# Altium PCB ZMBo 1.1.PcbDoc (part 2 of 4)
Units mil, origin at the board's own origin, x right, y up, seen from the top; angles counter-clockwise.
Board outline 6000 x 4000 mil, 4 copper layers (Top Layer, Groun Plane, Power Plane, Bottom Layer); 280 components, 251 nets, 1047 pads, 1788 vias.
Unrouted connection lines stored in the file: 231.
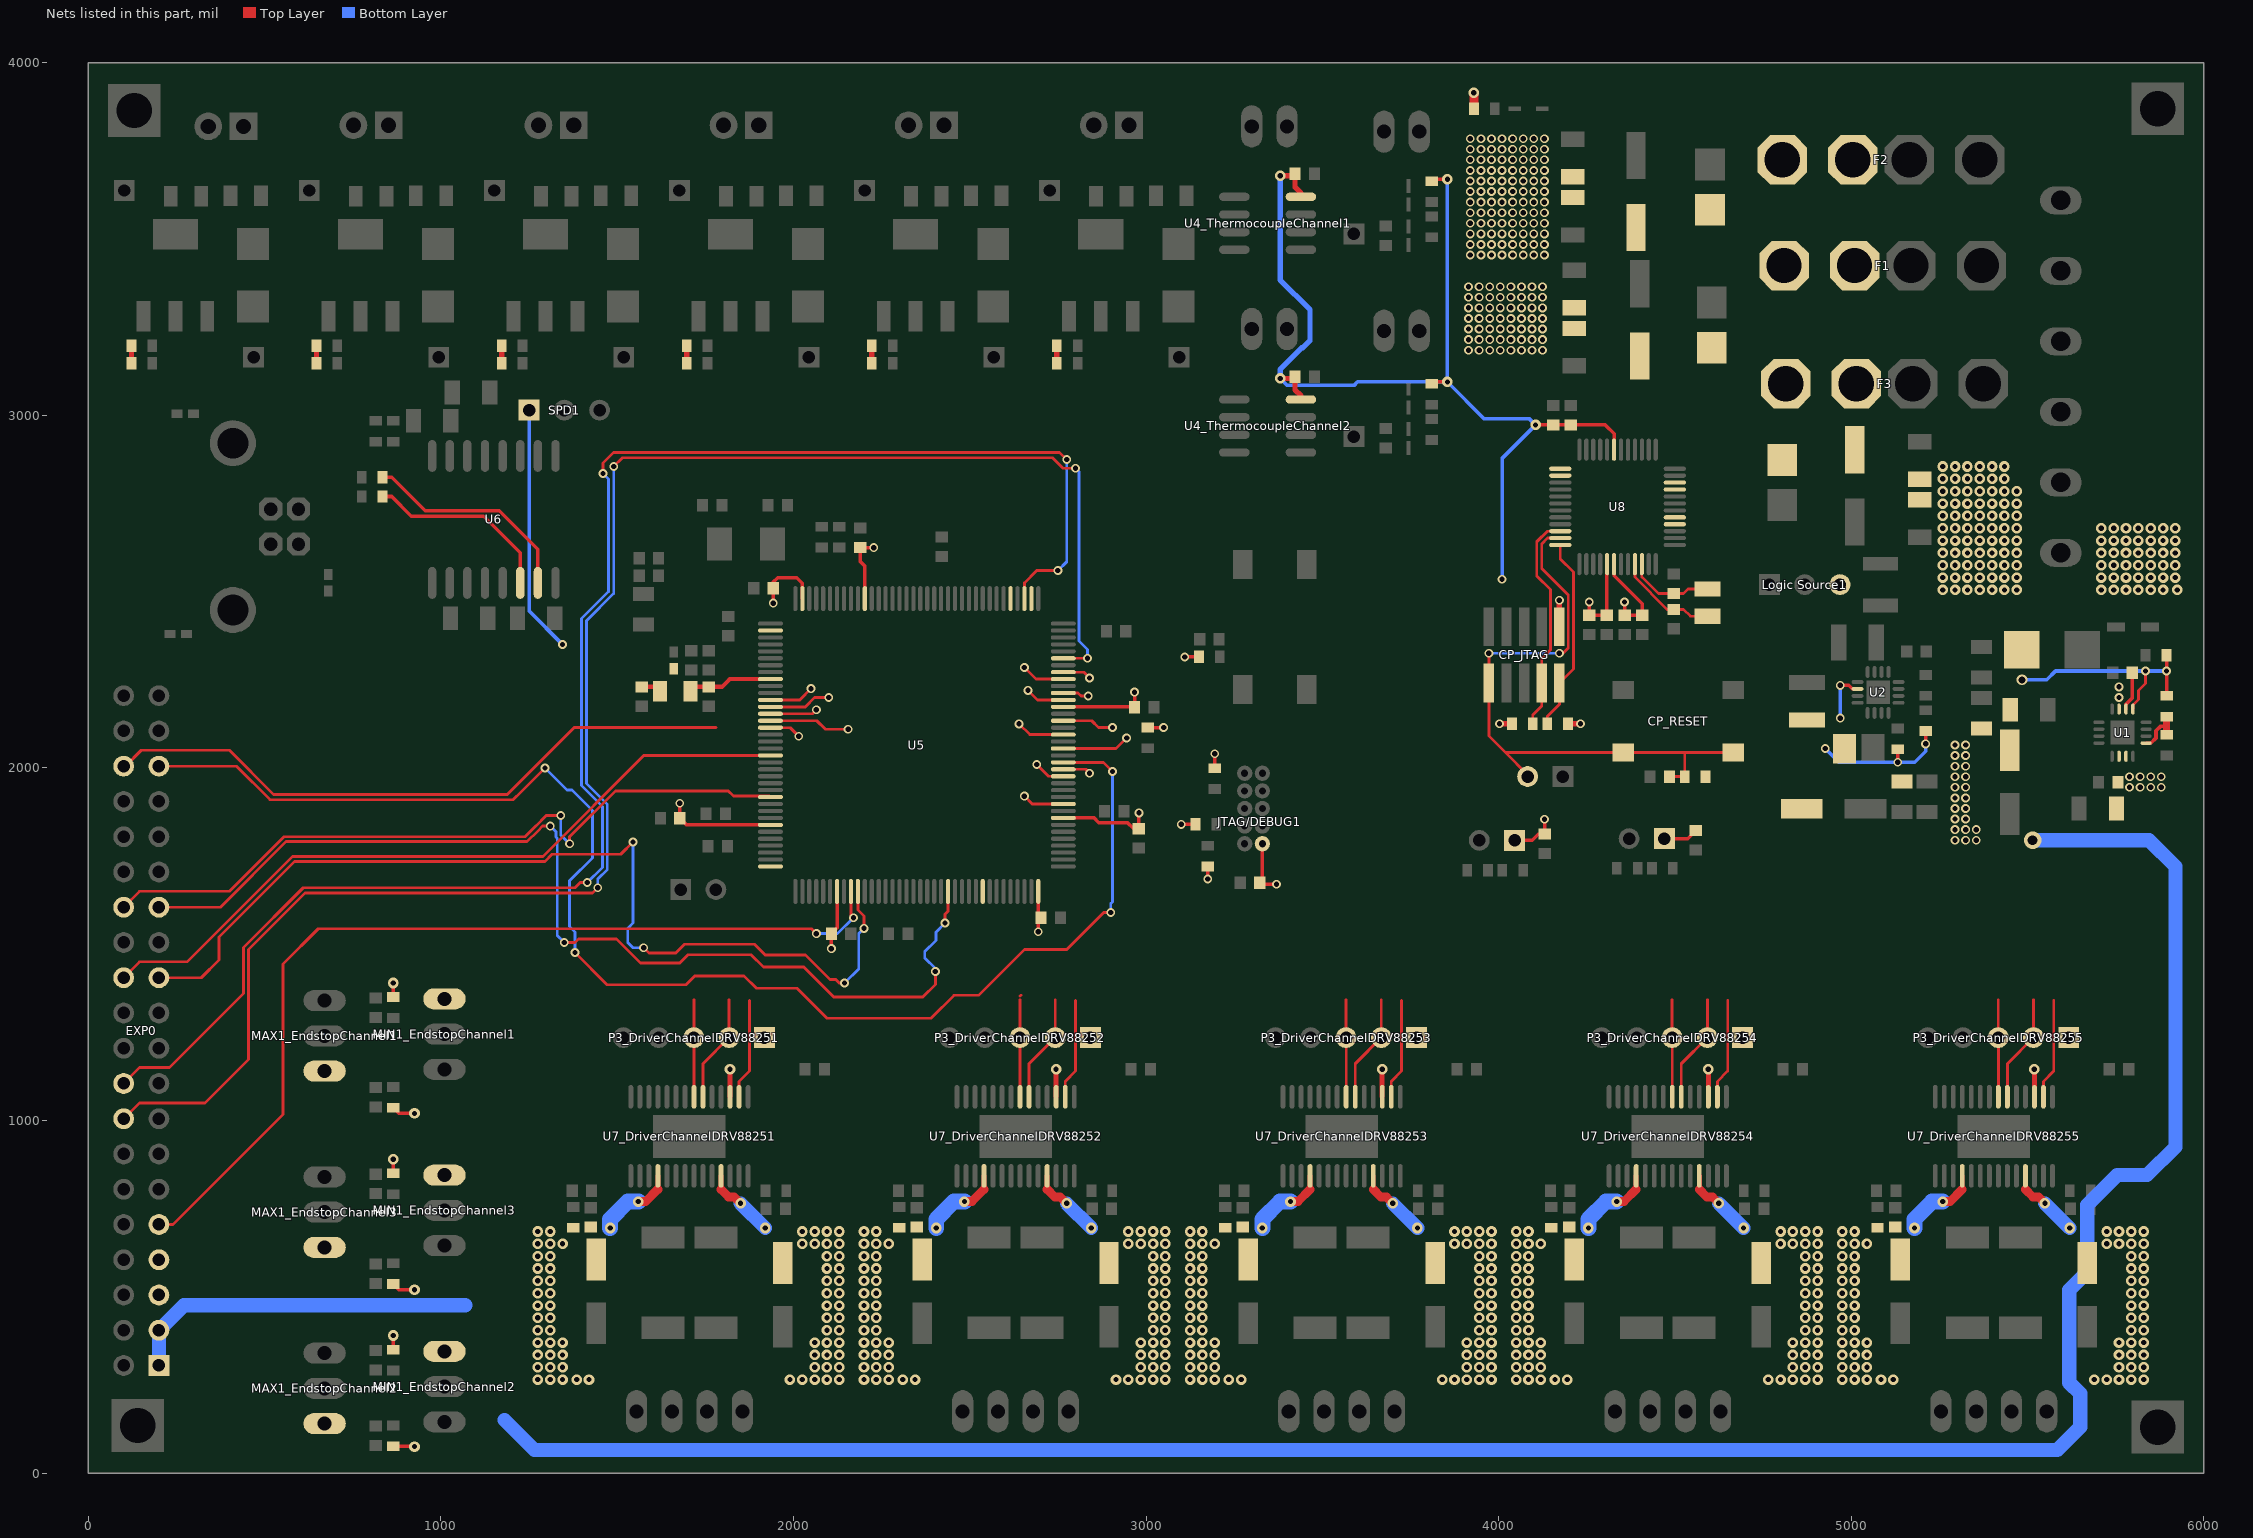
[diagram p4: the nets of this part, all layers, seen from the top]

## Part data
C1_EndstopChannel1 C1_EndstopChannel2 C1_EndstopChannel3 C2_EndstopChannel1 C2_EndstopChannel2 C2_EndstopChannel3 C4 C5 C6 C9 C14 C15 C18 C19 C22 C23 C24 C32 C33 C36 C37 C38 C39 C40 C41 C42 C43 C44 C45 C46 C47 C48 C49 C50 C51 C54 C55 C56 C57 C58 C59 C64 C65 C66_DriverChannelDRV88251 C66_DriverChannelDRV88252 C66_DriverChannelDRV88253 C66_DriverChannelDRV88254 C66_DriverChannelDRV88255 C67_DriverChannelDRV88251 C67_DriverChannelDRV88252 C67_DriverChannelDRV88253 C67_DriverChannelDRV88254 C67_DriverChannelDRV88255 C68_DriverChannelDRV88251 C68_DriverChannelDRV88252 C68_DriverChannelDRV88253 C68_DriverChannelDRV88254 C68_DriverChannelDRV88255 C71_DriverChannelDRV88251 C71_DriverChannelDRV88252 C71_DriverChannelDRV88253 C71_DriverChannelDRV88254 C71_DriverChannelDRV88255 C72 C73 C74 C75 C76 C77 C78 C79 C80: library part "Cap Semi", "Capacitor (Semiconductor SIM Model)"
C3 C12 C16 C69_DriverChannelDRV88251 C69_DriverChannelDRV88252 C69_DriverChannelDRV88253 C69_DriverChannelDRV88254 C69_DriverChannelDRV88255 C70_DriverChannelDRV88251 C70_DriverChannelDRV88252 C70_DriverChannelDRV88253 C70_DriverChannelDRV88254 C70_DriverChannelDRV88255: library part "Cap Pol1", "Polarized Capacitor (Radial)"
C7 C8 C10 C11 C30_ThermistorChannel1 C30_ThermistorChannel2 C31_ThermocoupleChannel1 C31_ThermocoupleChannel2 C60 C61 C62 C63: "Capacitor (Semiconductor SIM Model)"
CP_JTAG: library part "ARM Cortex JTAG-DEBUG Header"
D1: library part "D Zener", "Zener Diode"
D2_FETChannel1 D2_FETChannel2 D2_FETChannel3 D2_FETChannel4 D2_FETChannel5 D2_FETChannel6: "Typical RED GaAs LED"
D3_FETChannel1 D3_FETChannel2 D3_FETChannel3 D3_FETChannel4 D3_FETChannel5 D3_FETChannel6 D4 D6 D8: library part "D Schottky", "Schottky Diode"
D5: "Default Diode"
D7 D9: "Typical RED, GREEN, YELLOW, AMBER GaAs LED"
D11_ThermistorChannel1 D11_ThermistorChannel2 D12_ThermistorChannel1 D12_ThermistorChannel2: "High Conductance Fast Diode"
DBGEN1 kRESET P4 TRST1: "Header, 2-Pin"
EXP0: "Header, 20-Pin, Dual row"
F1 F2 F3 F4: library part "Fuse 1", "Fuse"
FB4 FB9 L2: library part Inductor, "Inductor"
"Logic Source1" SPD1: "Header, 3-Pin"
M1_DriverChannelDRV88251 M1_DriverChannelDRV88252 M1_DriverChannelDRV88253 M1_DriverChannelDRV88254 M1_DriverChannelDRV88255: library part "Molex 0705430003 Alt", "Molex 4 Pin Clip Connector"
MAX1_EndstopChannel1 MAX1_EndstopChannel2 MAX1_EndstopChannel3 MIN1_EndstopChannel1 MIN1_EndstopChannel2 MIN1_EndstopChannel3: library part "Molex Endstop"
P3_DriverChannelDRV88251 P3_DriverChannelDRV88252 P3_DriverChannelDRV88253 P3_DriverChannelDRV88254 P3_DriverChannelDRV88255: "Header, 5-Pin"
Q1_FETChannel1 Q1_FETChannel2 Q1_FETChannel3 Q1_FETChannel4 Q1_FETChannel5 Q1_FETChannel6: library part "Fairchild FDT439N", "N-Channel MOSFET"
R1 R7 R8 R9 R10 R11 R13_ThermistorChannel1 R13_ThermistorChannel2 R14_ThermistorChannel1 R14_ThermistorChannel2 R21 R23: "Resistor"
R2_EndstopChannel1 R2_EndstopChannel2 R2_EndstopChannel3 R3_EndstopChannel1 R3_EndstopChannel2 R3_EndstopChannel3 R4_FETChannel1 R4_FETChannel2 R4_FETChannel3 R4_FETChannel4 R4_FETChannel5 R4_FETChannel6 R5_FETChannel1 R5_FETChannel2 R5_FETChannel3 R5_FETChannel4 R5_FETChannel5 R5_FETChannel6 R6_FETChannel1 R6_FETChannel2 R6_FETChannel3 R6_FETChannel4 R6_FETChannel5 R6_FETChannel6 R12 R15 R16 R17 R18 R19 R20 R22 R24 R25 R26 R27 R28 R29 R30_DriverChannelDRV88251 R30_DriverChannelDRV88252 R30_DriverChannelDRV88253 R30_DriverChannelDRV88254 R30_DriverChannelDRV88255 R31_DriverChannelDRV88251 R31_DriverChannelDRV88252 R31_DriverChannelDRV88253 R31_DriverChannelDRV88254 R31_DriverChannelDRV88255 R32_DriverChannelDRV88251 R32_DriverChannelDRV88252 R32_DriverChannelDRV88253 R32_DriverChannelDRV88254 R32_DriverChannelDRV88255 R33_DriverChannelDRV88251 R33_DriverChannelDRV88252 R33_DriverChannelDRV88253 R33_DriverChannelDRV88254 R33_DriverChannelDRV88255 R34 R35 R36 R37 R38: library part Res3, "Resistor"
THM_TP1_ThermistorChannel1 THM_TP1_ThermistorChannel2: library part Socket, "Socket"
U2: "Buck Step Down Regulator with 3 to 17 V Input and 3.3 V Output, -40 to 85 degC, 16-Pin QFN (RGT), Green (RoHS & no Sb/Br)"
U4_ThermocoupleChannel1 U4_ThermocoupleChannel2: "Cold Junction Compensated Thermocouple to Digital Converter, 14 Bits Temperature Resolution, -40 to 125 degC, 8-Pin SOIC (S8+4), Pb-Free"
U5: library part ATML-ATSAM4EXEA-LQFP-144
U6: "USB Opto Isolator"
U7_DriverChannelDRV88251 U7_DriverChannelDRV88252 U7_DriverChannelDRV88253 U7_DriverChannelDRV88254 U7_DriverChannelDRV88255: "DRV8825 Ti Stepper Driver"
U8: "ARM Cortex M0+"
X1: "ABS07-32.768KHZ-T RTC Crystal Oscillator"
X2: library part XTAL, "Crystal Oscillator"

## Free pads (board coordinates)
  rect 150x150 hole 100: ""(130,3865) ""(140,135) ""(5870,130) ""(5870,3870)

## Via types
v1: diameter 30, hole 15, Top Layer to Bottom Layer, 1271 vias
v2: diameter 25, hole 15, Top Layer to Bottom Layer, 410 vias
v3: diameter 19.68, hole 7.87, Top Layer to Bottom Layer, 75 vias
v4: diameter 50, hole 28, Top Layer to Bottom Layer, 30 vias
v5: diameter 30, hole 20, Top Layer to Bottom Layer, 2 vias

## Nets (pads, with @x,y where several pads share a name; then routed paths per layer and width w, separated by ;. In a path a pad name is that pad's centre, name@x,y a point inside that pad or via, vN(x,y) a via of type N, cw(c..) or ccw(c..) an arc to the next point about the centre after c; other vN are vias at no path point)
2: 
3.3VCC: C4.1 C23.1 C31_ThermocoupleChannel1.2 C31_ThermocoupleChannel2.2 C45.2 C46.2 C47.2 C48.2 C49.2 C50.2 C51.2 C60.2 C61.2 C62.2 C74.2 C75.2 C76.2 C77.2 C78.1 C79.1 CP_JTAG.1 DBGEN1.1 EXP0.5 EXP0.7 FB5.1 JTAG/DEBUG1.1@3330,1785 L2.2 MAX1_EndstopChannel1.3 MAX1_EndstopChannel2.3 MAX1_EndstopChannel3.3 MIN1_EndstopChannel1.3 MIN1_EndstopChannel2.3 MIN1_EndstopChannel3.3 P3_DriverChannelDRV88251.1 P3_DriverChannelDRV88252.1 P3_DriverChannelDRV88253.1 P3_DriverChannelDRV88254.1 P3_DriverChannelDRV88255.1 R2_EndstopChannel1.1 R2_EndstopChannel2.1 R2_EndstopChannel3.1 R3_EndstopChannel1.1 R3_EndstopChannel2.1 R3_EndstopChannel3.1 R11.2 R12.2 R13_ThermistorChannel1.2 R13_ThermistorChannel2.2 R21.2 R24.2 R25.2 R26.2 R27.2 R34.1 R35.1 R36.2 R37.2 SPD1.1 TRST1.1 U2.14 U4_ThermocoupleChannel1.4 U4_ThermocoupleChannel2.4 U5.30 U5.43 U5.72 U5.80 U5.96 U5.134 U5.143 U7_DriverChannelDRV88251.17 U7_DriverChannelDRV88252.17 U7_DriverChannelDRV88253.17 U7_DriverChannelDRV88254.17 U7_DriverChannelDRV88255.17 U8.5 U8.6 U8.31 | length 7774
  Top Layer w10: R2_EndstopChannel2.1@865,75.95 924.05,75.95 v1(925,75) ; R3_EndstopChannel2.1@865,350 v1(865,390) ; R2_EndstopChannel3.1@865,535.95 865,535 880,520 v1(925,520) ; R3_EndstopChannel3.1@865,850 v1(865,890) ; R2_EndstopChannel1.1@865,1035.95 865,1035 880,1020 v1(925,1020) ; R3_EndstopChannel1.1@865,1350 v1(865,1390) ; v2(1677.56,1900) C45.2@1677.56,1857.56 1696.5,1838.62 U5.30@1934.65,1838.62 ; v2(1942.56,2467.56) C51.2@1942.56,2510 1942.56,2527.56 1955,2540 2008.99,2540 2025.2,2523.79 U5.143@2025.2,2480.35 ; v2(2107.44,1487.44) C46.2@2107.44,1530 2123.62,1546.18 U5.43@2123.62,1649.65 ; U5.134@2202.36,2480.35 2202.36,2572.82 2190,2585.19 C50.2@2190,2625 v2(2227.56,2625) ; v2(2694.49,1535.51) U5.72@2694.49,1649.65 ; U5.80@2765.35,1858.31 2852.67,1858.31 2865.98,1845 2947.56,1845 2965,1827.56 C48.2@2982.44,1827.56 ; U5.96@2765.35,2173.27 2966.73,2173.27 C49.2@2967.44,2172.56 v2(2967.44,2215.12) ; C48.2@2980,1830 v2(2980,1872.56) ; R26.2@3005.47,2114.53 v2(3050,2114.53) ; v2(3100,1840) R25.2@3140.47,1840 ; v2(3110,2315) R21.2@3150.47,2315 ; v2(3175,1685) R24.2@3175,1720.47 ; R27.2@3195,1999.53 v2(3195,2040) ; JTAG/DEBUG1.1@3330,1785 3330,1682.44 C62.2@3322.56,1675 3327.56,1670 v2(3370,1670) ; R13_ThermistorChannel2.2@3810,3089.53 3815.47,3095 v1(3855,3095) ; R13_ThermistorChannel1.2@3810,3664.53 3815.47,3670 v1(3855,3670) ; TRST1.1@4045.47,1794.53 4095.47,1794.53 4113.03,1812.09 C61.2@4130.47,1812.09 v2(4130.47,1854.53) ; v1(4105.04,2972.99) C76.2@4155.04,2972.99 C77.2@4205.04,2972.99 4302.6,2972.99 4327.76,2947.84 U8.31@4327.76,2902.87 ; v2(4257.6,2470.55) C75.2@4257.6,2433.11 C74.2@4307.6,2433.11 4307.6,2577.6 U8.5@4308.07,2578.07 ; U8.6@4327.76,2578.07 4327.76,2545.39 4407.6,2465.55 C78.1@4407.6,2433.11 C79.1@4357.6,2433.11 v2(4357.6,2470.55) ; DBGEN1.1@4470.39,1799.45 4536.89,1799.45 C60.2@4560,1822.56 ; v2(4969.58,2234.31) 4993.47,2234.31 5003.62,2224.15 U2.14@5018.51,2224.15 ; v2(5132.58,2016.31) R12.2@5132.58,2052.78 ; v2(5211.58,2068.31) R37.2@5211.58,2104.78
  Top Layer w14: U7_DriverChannelDRV88251.17@1820,1067.36 v1(1820,1145) ; U7_DriverChannelDRV88252.17@2745,1067.36 v1(2745,1145) ; U7_DriverChannelDRV88253.17@3670,1067.36 v1(3670,1145) ; U7_DriverChannelDRV88254.17@4595,1067.36 v1(4595,1145) ; U7_DriverChannelDRV88255.17@5520,1067.36 v1(5520,1145)
  Top Layer w15: v1(3380.51,3105) 3422.95,3105 3422.95,3072.56 3439.49,3056.02 U4_ThermocoupleChannel2.4@3439.49,3045 ; v1(3380.51,3680) 3422.95,3680 3422.95,3647.56 3439.49,3631.02 U4_ThermocoupleChannel1.4@3439.49,3620 ; v2(4002.6,2125.55) R35.1@4038.07,2125.55 ; CP_JTAG.1@4172.6,2400.39 v2(4172.6,2475.47) ; R34.1@4197.13,2125.55 v2(4232.6,2125.55)
  Bottom Layer w10: SPD1.1@1250,3015 1250,2445 v2(1345,2350) ; v1(3380.51,3105) 3400.51,3085 3590,3085 3600,3095 v1(3855,3095) ; v1(3855,3670) v1(3855,3095) ; v2(4010,2535) 4010,2877.95 v1(4105.04,2972.99) 4088.03,2990 3960,2990 v1(3855,3095) ; v2(4926.58,2055.31) 4965.58,2016.31 v2(5132.58,2016.31) 5180.58,2016.31 5211.58,2047.31 v2(5211.58,2068.31) ; v2(4969.58,2141.31) v2(4969.58,2234.31)
  Bottom Layer w15: v1(3380.51,3105) 3380.51,3130.51 3442.13,3192.13 3444.96,3192.13 3465,3212.17 3465,3300 3380.51,3384.49 v1(3380.51,3680)
+5VCC: "Logic Source1.3" C8.2 C9.1 EXP0.1 EXP0.3 L1.2 R7.2 R8.2 R9.1 U1.9 | length 8407
  Top Layer w8: U1.9@5799.53,2166.93 5799.53,2178.31 5815,2193.79 5815,2220 5835,2240 v2(5835,2275)
  Top Layer w10: R7.2@5895,2199.53 v2(5895,2275) R9.1@5895,2324.53
  Bottom Layer w10: v5(5485,2250) 5555,2250 5580,2275 v2(5895,2275)
  Bottom Layer w40: EXP0.1@200,305 EXP0.3@200,405 271,476 1069,476 ; 1180,150 1265,65 5585,65 5650,130 5650,225 5619,256 5619,519 5670,570 5670,760 5755,845 5840,845 5920,925 5920,1720 5845,1795 v4@5520,1795
  other v2: 5295,1795 5325,1795 5355,1795 5295,1825 5325,1825 5355,1825 5295,1855 5325,1855 5295,1885 5325,1885 5295,1915 5325,1915 5295,1945 5325,1945 5295,1975 5325,1975 5295,2005 5325,2005 5295,2035 5325,2035 5295,2065 5325,2065
  other v4: 5515,1795
+12VCC1: C10.2 C11.2 C16.1 C18.2 C19.2 C66_DriverChannelDRV88251.1 C66_DriverChannelDRV88252.1 C66_DriverChannelDRV88253.1 C66_DriverChannelDRV88254.1 C66_DriverChannelDRV88255.1 C69_DriverChannelDRV88251.1 C69_DriverChannelDRV88252.1 C69_DriverChannelDRV88253.1 C69_DriverChannelDRV88254.1 C69_DriverChannelDRV88255.1 C70_DriverChannelDRV88251.1 C70_DriverChannelDRV88252.1 C70_DriverChannelDRV88253.1 C70_DriverChannelDRV88254.1 C70_DriverChannelDRV88255.1 D8.2 F3.2 R30_DriverChannelDRV88251.1 R30_DriverChannelDRV88252.1 R30_DriverChannelDRV88253.1 R30_DriverChannelDRV88254.1 R30_DriverChannelDRV88255.1 U1.2 U1.3 U1.11 U7_DriverChannelDRV88251.4 U7_DriverChannelDRV88251.11 U7_DriverChannelDRV88252.4 U7_DriverChannelDRV88252.11 U7_DriverChannelDRV88253.4 U7_DriverChannelDRV88253.11 U7_DriverChannelDRV88254.4 U7_DriverChannelDRV88254.11 U7_DriverChannelDRV88255.4 U7_DriverChannelDRV88255.11 | length 2214.5
  Top Layer w14: 1615.43,804.43 U7_DriverChannelDRV88251.4@1615.43,842.8 ; 1794.57,804.43 U7_DriverChannelDRV88251.11@1794.57,842.8 ; 2540.43,804.43 U7_DriverChannelDRV88252.4@2540.43,842.8 ; 2719.57,804.43 U7_DriverChannelDRV88252.11@2719.57,842.8 ; 3465.43,804.43 U7_DriverChannelDRV88253.4@3465.43,842.8 ; 3644.57,804.43 U7_DriverChannelDRV88253.11@3644.57,842.8 ; 4390.43,804.43 U7_DriverChannelDRV88254.4@4390.43,842.8 ; 4569.57,804.43 U7_DriverChannelDRV88254.11@4569.57,842.8 ; 5315.43,804.43 U7_DriverChannelDRV88255.4@5315.43,842.8 ; 5494.57,804.43 U7_DriverChannelDRV88255.11@5494.57,842.8
  Top Layer w25: v1(1560,770) 1581,770 1615.43,804.43 ; 1794.57,804.43 1816,783 1832,783 v1(1850,765) ; v1(2485,770) 2506,770 2540.43,804.43 ; 2719.57,804.43 2741,783 2757,783 v1(2775,765) ; v1(3410,770) 3431,770 3465.43,804.43 ; 3644.57,804.43 3666,783 3682,783 v1(3700,765) ; v1(4335,770) 4356,770 4390.43,804.43 ; 4569.57,804.43 4591,783 4607,783 v1(4625,765) ; v1(5260,770) 5281,770 5315.43,804.43 ; 5494.57,804.43 5516,783 5532,783 v1(5550,765)
  Bottom Layer w39: v1(1850,765) v1(1920,695) ; v1(2775,765) v1(2845,695) ; v1(3700,765) v1(3770,695) ; v1(4625,765) v1(4695,695) ; v1(5550,765) v1(5620,695)
  Bottom Layer w45: v1(1480,695) 1480,720 1530,770 v1(1560,770) ; v1(2405,695) 2405,720 2455,770 v1(2485,770) ; v1(3330,695) 3330,720 3380,770 v1(3410,770) ; v1(4255,695) 4255,720 4305,770 v1(4335,770) ; v1(5180,695) 5180,720 5230,770 v1(5260,770)
  other v1: 1275,265 1310,265 1345,265 1385,265 1420,265 1990,265 2025,265 2060,265 2095,265 2130,265 2200,265 2235,265 2270,265 2310,265 2345,265 2915,265 2915,265 2950,265 2950,265 2985,265 2985,265 3020,265 3020,265 3055,265 3055,265 3125,265 3160,265 3195,265 3235,265 3270,265 3840,265 3875,265 3910,265 3945,265 3980,265 4050,265 4085,265 4120,265 4160,265 4195,265 4765,265 4800,265 4835,265 4870,265 4905,265 4975,265 5010,265 5045,265 5085,265 5120,265 5690,265 5725,265 5760,265 5795,265 5830,265 1275,300 1310,300 1345,300 2060,300 2095,300 2130,300 2200,300 2235,300 2235,300 2270,300 2985,300 2985,300 3020,300 3020,300 3055,300 3055,300 3125,300 3160,300 3195,300 3910,300 3945,300 3980,300 4050,300 4085,300 4120,300 4835,300 4870,300 4905,300 4975,300 5010,300 5045,300 5760,300 5795,300 5830,300 1275,335 1310,335 1345,335 2060,335 2095,335 2130,335 2200,335 2235,335 2270,335 2985,335 3020,335 3055,335 3055,335 3125,335 3160,335 3195,335 3910,335 3945,335 3980,335 4050,335 4085,335 4120,335 4835,335 4870,335 4905,335 4975,335 5010,335 5045,335 5760,335 5795,335 5830,335 1275,370 1310,370 1345,370 2060,370 2095,370 2130,370 2200,370 2200,370 2235,370 2235,370 2270,370 2985,370 2985,370 3020,370 3020,370 3055,370 3055,370 3125,370 3160,370 3195,370 3910,370 3945,370 3980,370 4050,370 4085,370 4120,370 4835,370 4870,370 4905,370 4975,370 5010,370 5045,370 5760,370 5795,370 5830,370 1275,405 1310,405 2095,405 2130,405 2200,405 2200,405 2200,405 2200,405 2200,405 2235,405 2235,405 3020,405 3020,405 3055,405 3055,405 3125,405 3125,405 3160,405 3945,405 3980,405 4050,405 4050,405 4085,405 4870,405 4905,405 4975,405 4975,405 5010,405 5795,405 5830,405 1275,440 1310,440 2095,440 2130,440 2200,440 2200,440 2200,440 2200,440 2200,440 2235,440 2235,440 3020,440 3020,440 3055,440 3055,440 3125,440 3125,440 3160,440 3945,440 3980,440 4050,440 4050,440 4085,440 4870,440 4905,440 4975,440 4975,440 5010,440 5795,440 5830,440 1275,475 1310,475 2095,475 2130,475 2200,475 2200,475 2200,475 2200,475 2200,475 2235,475 2235,475 3020,475 3020,475 3055,475 3055,475 3125,475 3125,475 3160,475 3945,475 3980,475 4050,475 4050,475 4085,475 4870,475 4905,475 4975,475 4975,475 5010,475 5795,475 5830,475 1275,510 1310,510 2095,510 2130,510 2200,510 2200,510 2200,510 2200,510 2200,510 2235,510 2235,510 3020,510 3020,510 3055,510 3055,510 3125,510 3125,510 3160,510 3945,510 3980,510 4050,510 4050,510 4085,510 4870,510 4905,510 4975,510 4975,510 5010,510 5795,510 5830,510 1275,545 1310,545 2095,545 2130,545 2200,545 2200,545 2200,545 2200,545 2200,545 2235,545 2235,545 3020,545 3020,545 3055,545 3055,545 3125,545 3125,545 3160,545 3945,545 3980,545 4050,545 4050,545 4085,545 4870,545 4905,545 4975,545 4975,545 5010,545 5795,545 5830,545 1275,580 1310,580 2095,580 2130,580 2200,580 2200,580 2200,580 2200,580 2200,580 2235,580 2235,580 3020,580 3020,580 3055,580 3055,580 3125,580 3125,580 3160,580 3945,580 3980,580 4050,580 4050,580 4085,580 4870,580 4905,580 4975,580 4975,580 5010,580 5795,580 5830,580 1275,615 1310,615 2095,615 2130,615 2200,615 2200,615 2235,615 2235,615 3020,615 3020,615 3055,615 3055,615 3125,615 3160,615 3945,615 3980,615 4050,615 4085,615 4870,615 4905,615 4975,615 5010,615 5795,615 5830,615 1275,650 1310,650 1345,650 2025,650 2060,650 2095,650 2130,650 2200,650 2200,650 2235,650 2235,650 2270,650 2270,650 2950,650 2950,650 2985,650 2985,650 3020,650 3020,650 3055,650 3055,650 3125,650 3160,650 3195,650 3875,650 3910,650 3945,650 3980,650 4050,650 4085,650 4120,650 4800,650 4835,650 4870,650 4905,650 4975,650 5010,650 5045,650 5725,650 5760,650 5795,650 5830,650 1275,685 1310,685 2025,685 2060,685 2095,685 2130,685 2200,685 2200,685 2235,685 2235,685 2950,685 2950,685 2985,685 2985,685 3020,685 3020,685 3055,685 3055,685 3125,685 3160,685 3875,685 3910,685 3945,685 3980,685 4050,685 4085,685 4800,685 4835,685 4870,685 4905,685 4975,685 5010,685 5725,685 5760,685 5795,685 5830,685 5260,2505 5295,2505 5330,2505 5365,2505 5400,2505 5435,2505 5470,2505 5710,2505 5745,2505 5780,2505 5815,2505 5850,2505 5885,2505 5925,2505 5260,2540 5295,2540 5330,2540 5365,2540 5400,2540 5435,2540 5470,2540 5710,2540 5745,2540 5780,2540 5815,2540 5850,2540 5885,2540 5920,2540 5260,2575 5295,2575 5330,2575 5365,2575 5400,2575 5435,2575 5470,2575 5710,2575 5745,2575 5780,2575 5815,2575 5850,2575 5885,2575 5920,2575 5260,2610 5295,2610 5330,2610 5365,2610 5400,2610 5435,2610 5470,2610 5710,2610 5745,2610 5780,2610 5815,2610 5850,2610 5885,2610 5920,2610 5260,2645 5295,2645 5330,2645 5365,2645 5400,2645 5435,2645 5470,2645 5710,2645 5745,2645 5780,2645 5815,2645 5850,2645 5885,2645 5920,2645 5260,2680 5295,2680 5330,2680 5365,2680 5400,2680 5435,2680 5470,2680 5710,2680 5745,2680 5780,2680 5815,2680 5850,2680 5885,2680 5920,2680 5260,2715 5295,2715 5330,2715 5365,2715 5400,2715 5435,2715 5470,2715 5260,2750 5295,2750 5330,2750 5365,2750 5400,2750 5435,2750 5470,2750 5260,2785 5295,2785 5330,2785 5365,2785 5400,2785 5435,2785 5470,2785 5260,2820 5295,2820 5330,2820 5365,2820 5400,2820 5435,2820 5260,2855 5295,2855 5330,2855 5365,2855 5400,2855 5435,2855
  other v2: 5790,1945 5820,1945 5850,1945 5880,1945 5790,1975 5820,1975 5850,1975 5880,1975 5760.16,2200 5760,2230
+12VCC2: C3.1 C5.2 C6.2 D4.2 F2.2 R1.2 | length 45.2
  Top Layer w8: R1.2@3930,3870.47 R1.2@3930.47,3870
  Top Layer w25: R1.2@3930,3870.47 v1(3930,3915)
  other v2: 3920,3455 3950,3455 3980,3455 4010,3455 4040,3455 4070,3455 4100,3455 4130,3455 3920,3485 3950,3485 3980,3485 4010,3485 4040,3485 4070,3485 4100,3485 4130,3485 3920,3515 3950,3515 3980,3515 4010,3515 4040,3515 4070,3515 4100,3515 4130,3515 3920,3545 3950,3545 3980,3545 4010,3545 4040,3545 4070,3545 4100,3545 4130,3545 3920,3575 3950,3575 3980,3575 4010,3575 4040,3575 4070,3575 4100,3575 4130,3575 3920,3605 3950,3605 3980,3605 4010,3605 4040,3605 4070,3605 4100,3605 4130,3605 3920,3635 3950,3635 3980,3635 4010,3635 4040,3635 4070,3635 4100,3635 4130,3635 3920,3665 3950,3665 3980,3665 4010,3665 4040,3665 4070,3665 4100,3665 4130,3665 3920,3695 3950,3695 3980,3695 4010,3695 4040,3695 4070,3695 4100,3695 4130,3695 3920,3725 3950,3725 3980,3725 4010,3725 4040,3725 4070,3725 4100,3725 4130,3725 3920,3755 3950,3755 3980,3755 4010,3755 4040,3755 4070,3755 4100,3755 4130,3755 3920,3785 3950,3785 3980,3785 4010,3785 4040,3785 4070,3785 4100,3785 4130,3785
+12VCC3: C12.1 C14.2 C15.2 D6.2 F1.2
  other v2: 3915,3185 3945,3185 3975,3185 4005,3185 4035,3185 4065,3185 4095,3185 4125,3185 3915,3215 3945,3215 3975,3215 4005,3215 4035,3215 4065,3215 4095,3215 4125,3215 3915,3245 3945,3245 3975,3245 4005,3245 4035,3245 4065,3245 4095,3245 4125,3245 3915,3275 3945,3275 3975,3275 4005,3275 4035,3275 4065,3275 4095,3275 4125,3275 3915,3305 3945,3305 3975,3305 4005,3305 4035,3305 4065,3305 4095,3305 4125,3305 3915,3335 3945,3335 3975,3335 4005,3335 4035,3335 4065,3335 4095,3335 4125,3335 3915,3365 3945,3365 3975,3365 4005,3365 4035,3365 4065,3365 4095,3365 4125,3365
ADC_TRIGGER: U5.36
ATSAM_SS: U5.64
AVDD3.3: C64.2 FB9.1 | length 56.9
  Top Layer w12: C64.2@1570,2230.12 1609.13,2230.12 FB9.1@1621.69,2217.56
AVREF: C65.2 FB9.2 U5.9 | length 240.6
  Top Layer w12: FB9.2@1708.31,2217.56 1720.87,2230.12 C65.2@1760,2230.12 1797.56,2230.12 1819.45,2252.01 U5.9@1934.65,2252.01
BST: C7.2 U1.10 | length 110.4
  Top Layer w10: U1.10@5779.84,2166.93 5779.84,2180.59 5797.56,2198.3 C7.2@5797.56,2270
CP_EXTAL0: C72.1 U8.9 X1.2 | length 288.4
  Top Layer w8: U8.9@4386.81,2578.07 4386.81,2541.34 4478.27,2449.88 C72.1@4497.6,2449.88 4525.04,2449.88 4544.37,2430.55 X1.2@4592.6,2430.55
CP_RESET: C80.1 CP_JTAG.10 CP_RESET.2 P4.2 R36.1 U8.47 | length 1762.8
  Top Layer w8: v2(3972.6,2325.47) CP_JTAG.10@3972.6,2240.55 3972.6,2090.55 4019.76,2043.39 ; P4.2@4082.6,1975.55 4082.6,1980.55 4019.76,2043.39 ; v2(4172.6,2325.47) 4182.6,2325.47 4197.6,2340.47 4197.6,2490.47 4122.6,2565.47 4122.6,2635.47 4139.02,2651.89 U8.47@4175.2,2651.89 ; C80.1@4485.16,1975.55 R36.1@4528.07,1975.55 4528.07,2037.91 ; CP_RESET.2@4665.16,2043.39 CP_RESET.2@4354.13,2043.39 4019.76,2043.39
  Bottom Layer w8: v2(3972.6,2325.47) v2(4172.6,2325.47)
CP_TCK/SWDCLK: CP_JTAG.4 R35.2 U8.46 | length 631.9
  Top Layer w8: R35.2@4097.13,2125.55 4097.13,2150.08 4122.6,2175.55 CP_JTAG.4@4122.6,2240.55 4122.6,2310.51 4147.36,2335.27 4147.36,2505.71 4108.6,2544.47 4108.6,2641.47 4138.7,2671.57 U8.46@4175.2,2671.57
CP_TMS/SWDIO: CP_JTAG.2 R34.2 U8.48 | length 553
  Top Layer w8: R34.2@4138.07,2125.55 4138.07,2146.02 4172.6,2180.55 CP_JTAG.2@4172.6,2240.55 4212.6,2280.55 4212.6,2555.47 4175.2,2592.87 U8.48@4175.2,2632.2
CP_XTAL0: C73.1 U8.10 X1.1 | length 247.1
  Top Layer w8: U8.10@4406.5,2578.07 4406.5,2541.65 4453.39,2494.77 C73.1@4497.6,2494.77 4525.04,2494.77 4537.6,2507.32 X1.1@4592.6,2507.32
DIR: P3_DriverChannelDRV88251.2 P3_DriverChannelDRV88252.2 P3_DriverChannelDRV88253.2 P3_DriverChannelDRV88254.2 P3_DriverChannelDRV88255.2 U7_DriverChannelDRV88251.20 U7_DriverChannelDRV88252.20 U7_DriverChannelDRV88253.20 U7_DriverChannelDRV88254.20 U7_DriverChannelDRV88255.20 | length 1530
  Top Layer w8: U7_DriverChannelDRV88251.20@1743.39,1067.2 1743.39,1160.89 P3_DriverChannelDRV88251.2@1817.5,1235 1817.5,1342.5 ; U7_DriverChannelDRV88252.20@2668.39,1067.2 2668.39,1160.89 P3_DriverChannelDRV88252.2@2742.5,1235 2742.5,1342.5 ; U7_DriverChannelDRV88253.20@3593.39,1067.2 3593.39,1160.89 P3_DriverChannelDRV88253.2@3667.5,1235 3667.5,1342.5 ; U7_DriverChannelDRV88254.20@4518.39,1067.2 4518.39,1160.89 P3_DriverChannelDRV88254.2@4592.5,1235 4592.5,1342.5 ; U7_DriverChannelDRV88255.20@5443.39,1067.2 5443.39,1160.89 P3_DriverChannelDRV88255.2@5517.5,1235 5517.5,1342.5
DIR1: U5.113
DIR2: U5.110
DIR3: U5.101 | length 81.6
  Top Layer w8: U5.101@2765.35,2271.69 2823.31,2271.69 v2(2840,2255)
DIR4: U5.98 | length 74.5
  Top Layer w8: U5.98@2765.35,2212.64 2807.36,2212.64 2816.18,2203.82 v2(2836.18,2203.82)
DIR5: U5.92 | length 138
  Top Layer w8: v2(2640,2125) 2670.47,2094.53 U5.92@2765.35,2094.53
DIR_EXP1: EXP0.27 U5.59 | length 3014.4
  Top Layer w8: EXP0.27@200,1605 374.4,1605 560.4,1791 1244.38,1791 1274.88,1821.5 1275.09,1821.5 1288.59,1835 v2(1310,1835) ; v2(1350,1505) 1380,1505 1390,1515 1498.38,1515 1566.38,1447 1677.6,1447 1700.6,1470 1879.8,1470 1914.8,1435 2029.07,1435 2069.13,1394.94 2069.46,1394.94 2114.4,1350 2366.82,1350 2402.5,1385.68 v2(2402.5,1422.5) ; v2(2430,1560) 2430,1585 2438.58,1593.58 U5.59@2438.58,1649.65
  Bottom Layer w8: v2(1310,1835) 1326,1819 1326,1804.2 1330,1800.2 1330,1525 v2(1350,1505) ; v2(2402.5,1422.5) 2402.5,1430.68 2372.5,1460.68 2372.5,1479.32 2403.94,1510.76 2403.94,1533.94 v2(2430,1560)
DIR_EXP2: EXP0.28 U5.26 | length 2088.9
  Top Layer w8: EXP0.28@100,1605 145,1650 399.6,1650 554.6,1805 1238.58,1805 1269.08,1835.5 1269.29,1835.5 1298.79,1865 v2(1340,1865) ; v2(1365,1785) 1365,1805 1495,1935 1815,1935 1830,1920 1932.01,1920 U5.26@1934.65,1917.36
  Bottom Layer w8: v2(1340,1865) 1340,1810 v2(1365,1785)
DM_N: R18.1 U6.6 | length 541.9
  Top Layer w10: R18.1@834.53,2770 860,2770 916,2714 1121,2714 1225,2610 U6.6@1225,2524.88
DP_P: R20.1 U6.7 | length 620.5
  Top Layer w10: R20.1@834.53,2825 860,2825 955,2730 1165,2730 1275,2620 U6.7@1275,2524.88
DRV_RESET: U7_DriverChannelDRV88251.16 U7_DriverChannelDRV88252.16 U7_DriverChannelDRV88253.16 U7_DriverChannelDRV88254.16 U7_DriverChannelDRV88255.16 | length 1424.6
  Top Layer w8: U7_DriverChannelDRV88251.16@1845.75,1067.2 1845.75,1110.75 1875,1140 1875,1340 ; U7_DriverChannelDRV88252.16@2770.75,1067.2 2770.75,1110.75 2800,1140 2800,1340 ; U7_DriverChannelDRV88253.16@3695.75,1067.2 3695.75,1110.75 3725,1140 3725,1340 ; U7_DriverChannelDRV88254.16@4620.75,1067.2 4620.75,1110.75 4650,1140 4650,1340 ; U7_DriverChannelDRV88255.16@5545.75,1067.2 5545.75,1110.75 5575,1140 5575,1340
DRV_RESET1: U5.82 | length 119.6
  Top Layer w8: v2(2655,1920) 2677.32,1897.68 U5.82@2765.35,1897.68
DRV_RESET2: U5.86 | length 89.3
  Top Layer w8: v2(2690,2010) 2723.58,1976.42 U5.86@2765.35,1976.42
DRV_RESET3: U5.90 | length 192
  Top Layer w8: U5.90@2765.35,2055.16 2915.16,2055.16 v2(2945,2085)
DRV_RESET4: U5.94 | length 147.5
  Top Layer w8: U5.94@2765.35,2133.9 2846.1,2133.9 2865,2115 v2(2905,2115)
DRV_RESET5: U5.97 | length 111.6
  Top Layer w8: v2(2665,2220) 2692.05,2192.95 U5.97@2765.35,2192.95
DRV_RESET_EXP1: EXP0.35 U5.88 | length 4087
  Top Layer w8: EXP0.35@200,2005 420,2005 515,1910 1204.99,1910 1228.49,1933.5 v2(1295,2000) ; v2(1380,1476.25) 1471.25,1385 1695,1385 1720,1410 1860,1410 1895,1375 2009.87,1375 2094.87,1290 2390,1290 2455,1355 2525,1355 2655,1485 2775,1485 2880,1590 v2(2900,1590) ; U5.88@2765.35,2015.79 2879.21,2015.79 v2(2905,1990)
  Bottom Layer w8: v2(1295,2000) 1357.5,1937.5 1371.28,1937.5 1430,1878.78 1430,1745 1365,1680 1365,1550 1380,1535 v2(1380,1476.25) ; v2(2900,1590) 2900,1615 2905,1620 v2(2905,1990)
DRV_RESET_EXP2: EXP0.36 U5.2 | length 1829.1
  Top Layer w8: EXP0.36@100,2005 105,2005 150,2050 400,2050 525,1925 1188.18,1925 1378.18,2115 1780,2115
EN: P3_DriverChannelDRV88251.3 P3_DriverChannelDRV88252.3 P3_DriverChannelDRV88253.3 P3_DriverChannelDRV88254.3 P3_DriverChannelDRV88255.3 U7_DriverChannelDRV88251.21 U7_DriverChannelDRV88252.21 U7_DriverChannelDRV88253.21 U7_DriverChannelDRV88254.21 U7_DriverChannelDRV88255.21 | length 1379.6
  Top Layer w8: P3_DriverChannelDRV88251.3@1717.5,1235 1717.5,1342.5 ; U7_DriverChannelDRV88251.21@1717.8,1067.2 P3_DriverChannelDRV88251.3@1717.8,1235 ; P3_DriverChannelDRV88252.3@2642.5,1235 2642.5,1342.5 ; U7_DriverChannelDRV88252.21@2642.8,1067.2 P3_DriverChannelDRV88252.3@2642.8,1235 ; 2642.8,1352.8 2645,1355 ; P3_DriverChannelDRV88253.3@3567.5,1235 3567.5,1342.5 ; U7_DriverChannelDRV88253.21@3567.8,1067.2 P3_DriverChannelDRV88253.3@3567.8,1235 ; P3_DriverChannelDRV88254.3@4492.5,1235 4492.5,1342.5 ; U7_DriverChannelDRV88254.21@4492.8,1067.2 P3_DriverChannelDRV88254.3@4492.8,1235 ; P3_DriverChannelDRV88255.3@5417.5,1235 5417.5,1342.5 ; U7_DriverChannelDRV88255.21@5417.8,1067.2 P3_DriverChannelDRV88255.3@5417.8,1235
EN1: U5.12 | length 128.6
  Top Layer w8: U5.12@1934.65,2192.95 2017.95,2192.95 v2(2050,2225)
EN2: U5.13 | length 176.4
  Top Layer w8: U5.13@1934.65,2173.27 2033.27,2173.27 2060,2200 v2(2100,2200)
EN3: U5.14 | length 135.1
  Top Layer w8: U5.14@1934.65,2153.58 2053.58,2153.58 v2(2065,2165)
EN4: U5.15 | length 230.3
  Top Layer w8: U5.15@1934.65,2133.9 2066.1,2133.9 2090,2110 v2(2155,2110)
EN5: U5.16 | length 90.4
  Top Layer w8: U5.16@1934.65,2114.21 1990.79,2114.21 v2(2015,2090)
EN_EXP1: EXP0.23 U5.46 | length 2806.8
  Top Layer w8: EXP0.23@200,1405 320,1405 370,1455 370,1520 585,1735 1295,1735 1315,1755 1510,1755 v2(1545,1790) ; v2(1575,1490) 1590,1475 1666.01,1475 1691.01,1500 1889.4,1500 1919.9,1469.5 2034.17,1469.5 2080.72,1422.94 2081.05,1422.94 2103.99,1400 2120,1400 2130,1390 v2(2145,1390) ; U5.46@2182.68,1649.65 2182.68,1597.32 2200,1580 v2(2200,1545)
  Bottom Layer w8: v2(1545,1790) 1545,1560 1530,1545 1530,1505 1545,1490 v2(1575,1490) ; v2(2145,1390) 2185.06,1430.06 2185.06,1496.88 2185,1496.94 2185,1530 v2(2200,1545)
EN_EXP2: EXP0.24 U5.20 | length 2095.8
  Top Layer w8: EXP0.24@100,1405 145,1450 280,1450 579,1749 1289,1749 1575.47,2035.47 U5.20@1934.65,2035.47
ERASE: U5.87 | length 79.2
  Top Layer w8: U5.87@2765.35,1996.1 2828.9,1996.1 v2(2840,1985)
EXP_CS: EXP0.9 U5.45 | length 2669.6
  Top Layer w8: EXP0.9@200,705 240,705 552,1017 552,1444.01 651.99,1544 2051,1544 v2(2065,1530) ; U5.45@2162.99,1649.65 2162.99,1582.01 v2(2170,1575)
  Bottom Layer w8: v2(2065,1530) 2125,1530 v2(2170,1575)
EXP_INTERRUP1: EXP0.16 U5.103 | length 5015.9
  Top Layer w8: EXP0.16@100,1005 145,1050 330.6,1050 454,1173.4 454,1484.6 614.4,1645 1430,1645 v2(1445,1660) ; v2(1490,2855) 1515,2880 2735,2880 2765,2850 v2(2800,2850) ; U5.103@2765.35,2311.06 v2(2833.94,2311.06)
  Bottom Layer w8: v2(1445,1660) 1445,1685.2 1472,1712.2 1472,1896.18 1412.5,1955.68 1412.5,2417.7 1490,2495.2 v2(1490,2855) ; v2(2800,2850) 2810,2840 2810,2360 2833.94,2336.06 v2(2833.94,2311.06)
EXP_INTERRUP2: EXP0.18 U5.111 | length 4713
  Top Layer w8: EXP0.18@100,1105 145,1150 230,1150 440,1360 440,1490.4 609.6,1660 1380,1660 1395,1675 v2(1415,1675) ; v2(1460,2835) 1460,2865 1490,2895 2755,2895 v2(2775,2875) ; U5.111@2655.12,2480.35 2655.12,2525.12 2690,2560 v2(2750,2560)
  Bottom Layer w8: v2(1415,1675) 1458,1718 1458,1890.38 1398.5,1949.88 1398.5,2423.5 1475,2500 1475,2820 v2(1460,2835) ; v2(2750,2560) 2775,2585 v2(2775,2875)
EXP_SYNC: U5.100 | length 124
  Top Layer w8: v2(2655,2285) 2687.99,2252.01 U5.100@2765.35,2252.01
FB: R7.1 R10.2 U1.5 | length 134.9
  Top Layer w10: U1.5@5836.93,2070.47 5850.59,2070.47 5865,2084.89 5865,2105 5877.74,2117.74 5895,2117.74
  Top Layer w20: R10.2@5895,2095 R7.1@5895,2140.47
FET_PWM: R5_FETChannel1.1 R5_FETChannel2.1 R5_FETChannel3.1 R5_FETChannel4.1 R5_FETChannel5.1 R5_FETChannel6.1 R6_FETChannel1.1 R6_FETChannel2.1 R6_FETChannel3.1 R6_FETChannel4.1 R6_FETChannel5.1 R6_FETChannel6.1 | length 300
  Top Layer w15: R6_FETChannel1.1@122.17,3148 R5_FETChannel1.1@122.17,3198 ; R6_FETChannel2.1@647.17,3148 R5_FETChannel2.1@647.17,3198 ; R6_FETChannel3.1@1172.17,3148 R5_FETChannel3.1@1172.17,3198 ; R6_FETChannel4.1@1697.17,3148 R5_FETChannel4.1@1697.17,3198 ; R6_FETChannel5.1@2222.17,3148 R5_FETChannel5.1@2222.17,3198 ; R6_FETChannel6.1@2747.17,3148 R5_FETChannel6.1@2747.17,3198
FET_PWM1: U8.16
FET_PWM2: U8.17
FET_PWM3: U8.21
FET_PWM4: U8.22
FET_PWM5: U8.38
FET_PWM6: U8.37